# Allegro board BSK-PI_03v1.brd
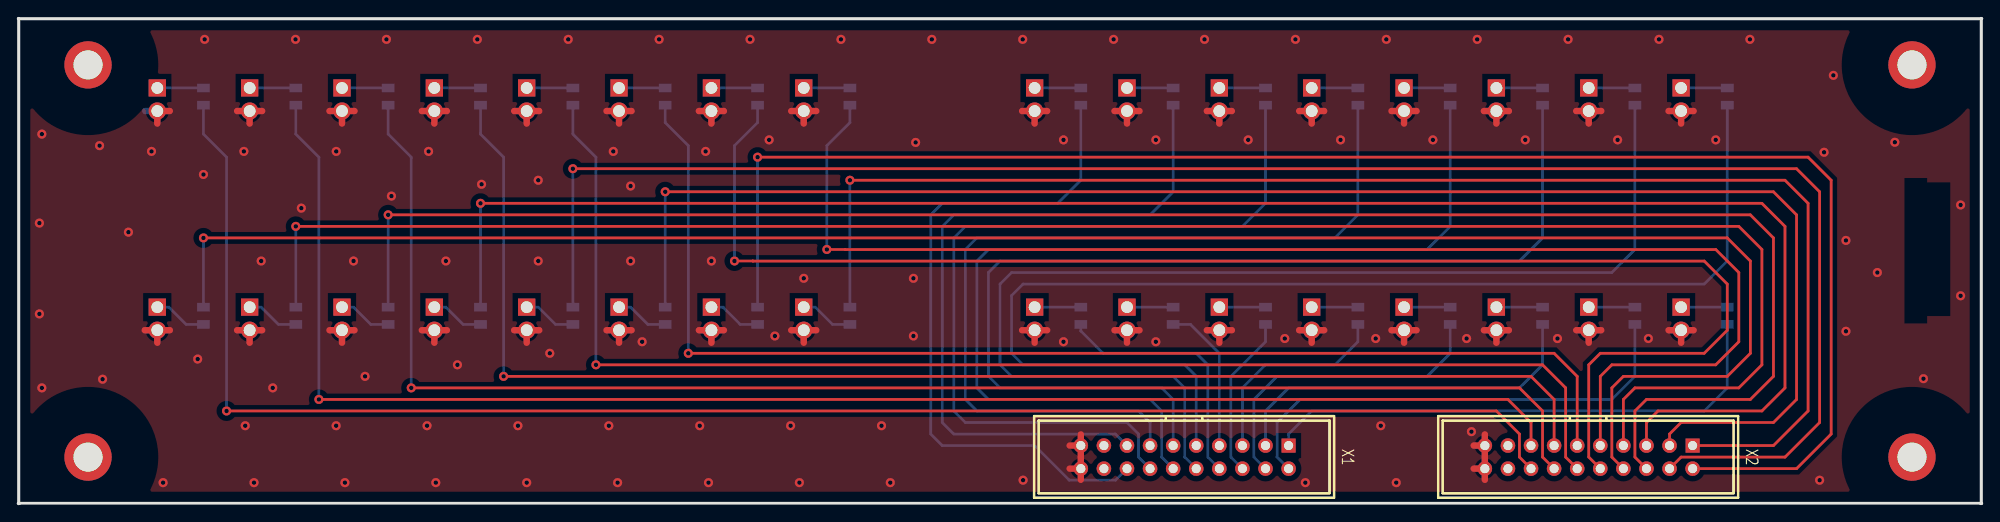
[diagram p0: board, top side]
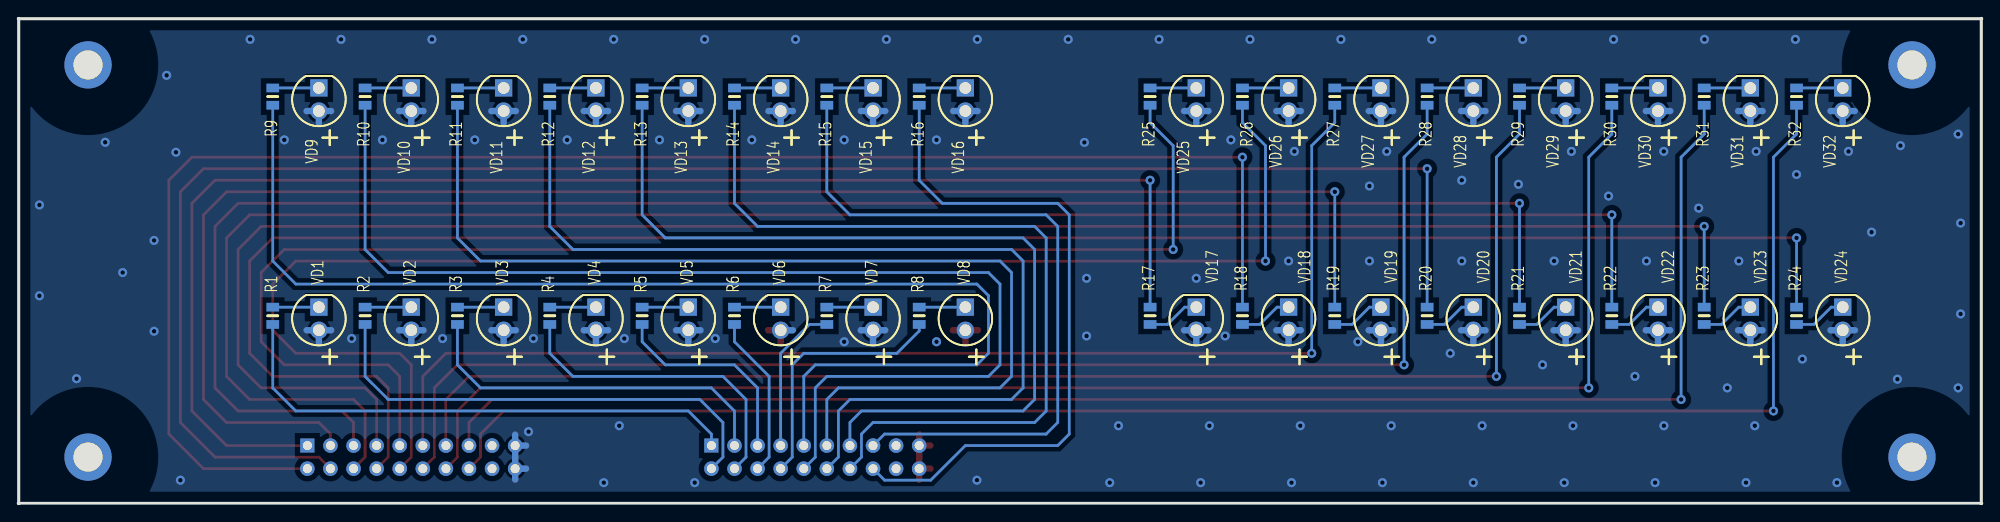
[diagram p1: board, bottom side, seen from below]

Outline 216.03 x 53.47 mm; copper layers: TOP, BOTTOM. Coordinates in mm from the lower left corner of the outline.
Outline path: 0.06,53.4 0.06,0.06 ; 0.06,53.4 215.96,53.4 ; 0.06,53.4 0.06,0.06 ; 0.06,53.4 215.96,53.4 ; 0.06,0.06 215.96,0.06 ; 215.96,53.4 215.96,0.06 ; 215.96,53.4 215.96,0.06 ; 0,53.4 arc(0.06,53.47) 0.13,53.4 arc(0.06,53.34) 0,53.4 ; 0,0.06 arc(0.06,0.13) 0.13,0.06 arc(0.06,0) 0,0.06 ; 0.03,53.4 arc(0.06,53.44) 0.1,53.4 arc(0.06,53.37) 0.03,53.4 ; 0.03,0.06 arc(0.06,0.1) 0.1,0.06 arc(0.06,0.03) 0.03,0.06 ; 215.9,53.4 arc(215.96,53.47) 216.03,53.4 arc(215.96,53.34) 215.9,53.4 ; 215.9,0.06 arc(215.96,0.13) 216.03,0.06 arc(215.96,0) 215.9,0.06 ; 215.93,53.4 arc(215.96,53.44) 216,53.4 arc(215.96,53.37) 215.93,53.4 ; 215.93,0.06 arc(215.96,0.1) 216,0.06 arc(215.96,0.03) 215.93,0.06

## Design rules (mm)
nets with their own width: min track width 0.6; nets +5V

## Placement (name value [footprint] x y rotation side)
NOREF  -  [unnamed]  7.68 5.14 0 top
NOREF#2  -  [unnamed]  208.34 5.14 0 top
NOREF#3  -  [unnamed]  208.34 48.32 0 top
NOREF#4  -  [unnamed]  7.68 48.32 0 top
R1  1k  [RESC2013X60N]  188.02 20.7 270 bottom
R2  1k  [RESC2013X60N]  177.86 20.7 270 bottom
R3  1k  [RESC2013X60N]  167.7 20.7 270 bottom
R4  1k  [RESC2013X60N]  157.54 20.7 270 bottom
R5  1k  [RESC2013X60N]  147.38 20.7 270 bottom
R6  1k  [RESC2013X60N]  137.22 20.7 270 bottom
R7  1k  [RESC2013X60N]  127.06 20.7 270 bottom
R8  1k  [RESC2013X60N]  116.9 20.7 270 bottom
R9  1k  [RESC2013X60N]  188.02 44.83 270 bottom
R10  1k  [RESC2013X60N]  177.86 44.83 270 bottom
R11  1k  [RESC2013X60N]  167.7 44.83 270 bottom
R12  1k  [RESC2013X60N]  157.54 44.83 270 bottom
R13  1k  [RESC2013X60N]  147.38 44.83 270 bottom
R14  1k  [RESC2013X60N]  137.22 44.83 270 bottom
R15  1k  [RESC2013X60N]  127.06 44.83 270 bottom
R16  1k  [RESC2013X60N]  116.9 44.83 270 bottom
R17  1k  [RESC2013X60N]  91.5 20.7 90 bottom
R18  1k  [RESC2013X60N]  81.34 20.7 90 bottom
R19  1k  [RESC2013X60N]  71.18 20.7 90 bottom
R20  1k  [RESC2013X60N]  61.02 20.7 90 bottom
R21  1k  [RESC2013X60N]  50.86 20.7 90 bottom
R22  1k  [RESC2013X60N]  40.7 20.7 90 bottom
R23  1k  [RESC2013X60N]  30.54 20.7 90 bottom
R24  1k  [RESC2013X60N]  20.38 20.7 90 bottom
R25  1k  [RESC2013X60N]  91.5 44.83 270 bottom
R26  1k  [RESC2013X60N]  81.34 44.83 270 bottom
R27  1k  [RESC2013X60N]  71.18 44.83 270 bottom
R28  1k  [RESC2013X60N]  61.02 44.83 270 bottom
R29  1k  [RESC2013X60N]  50.86 44.83 270 bottom
R30  1k  [RESC2013X60N]  40.7 44.83 270 bottom
R31  1k  [RESC2013X60N]  30.54 44.83 270 bottom
R32  1k  [RESC2013X60N]  20.38 44.83 270 bottom
VD1  Green  [LEDRD254W60D590H900USR]  182.94 20.38 270 bottom
VD2  Green  [LEDRD254W60D590H900USR]  172.78 20.38 270 bottom
VD3  Green  [LEDRD254W60D590H900USR]  162.62 20.38 270 bottom
VD4  Green  [LEDRD254W60D590H900USR]  152.46 20.38 270 bottom
VD5  Green  [LEDRD254W60D590H900USR]  142.3 20.38 270 bottom
VD6  Green  [LEDRD254W60D590H900USR]  132.14 20.38 270 bottom
VD7  Green  [LEDRD254W60D590H900USR]  121.98 20.38 270 bottom
VD8  Green  [LEDRD254W60D590H900USR]  111.82 20.38 270 bottom
VD9  Green  [LEDRD254W60D590H900USR]  182.94 44.51 270 bottom
VD10  Green  [LEDRD254W60D590H900USR]  172.78 44.51 270 bottom
VD11  Green  [LEDRD254W60D590H900USR]  162.62 44.51 270 bottom
VD12  Green  [LEDRD254W60D590H900USR]  152.46 44.51 270 bottom
VD13  Green  [LEDRD254W60D590H900USR]  142.3 44.51 270 bottom
VD14  Green  [LEDRD254W60D590H900USR]  132.14 44.51 270 bottom
VD15  Green  [LEDRD254W60D590H900USR]  121.98 44.51 270 bottom
VD16  Green  [LEDRD254W60D590H900USR]  111.82 44.51 270 bottom
VD17  Green  [LEDRD254W60D590H900USR]  86.42 20.38 270 bottom
VD18  Green  [LEDRD254W60D590H900USR]  76.26 20.38 270 bottom
VD19  Green  [LEDRD254W60D590H900USR]  66.1 20.38 270 bottom
VD20  Green  [LEDRD254W60D590H900USR]  55.94 20.38 270 bottom
VD21  Green  [LEDRD254W60D590H900USR]  45.78 20.38 270 bottom
VD22  Green  [LEDRD254W60D590H900USR]  35.62 20.38 270 bottom
VD23  Green  [LEDRD254W60D590H900USR]  25.46 20.38 270 bottom
VD24  Green  [LEDRD254W60D590H900USR]  15.3 20.38 270 bottom
VD25  Green  [LEDRD254W60D590H900USR]  86.42 44.51 270 bottom
VD26  Green  [LEDRD254W60D590H900USR]  76.26 44.51 270 bottom
VD27  Green  [LEDRD254W60D590H900USR]  66.1 44.51 270 bottom
VD28  Green  [LEDRD254W60D590H900USR]  55.94 44.51 270 bottom
VD29  Green  [LEDRD254W60D590H900USR]  45.78 44.51 270 bottom
VD30  Green  [LEDRD254W60D590H900USR]  35.62 44.51 270 bottom
VD31  Green  [LEDRD254W60D590H900USR]  25.46 44.51 270 bottom
VD32  Green  [LEDRD254W60D590H900USR]  15.3 44.51 270 bottom
X1  IDC-20M  [IDC_20M]  128.33 5.14 270 top
X2  IDC-20M  [IDC_20M]  172.78 5.14 270 top

## Library data of the parts
R1-R32 = RES_0.125W
VD1-VD32 = DIODE_LED
X1 X2 = CON_20

## Footprints (pads in the part's own frame, mm; a bottom-side part is the same pattern mirrored in y, then rotated)
IDC_20M
  rect 1.55x1.55 hole 1: 1(-1.27,11.43)
  round 1.6 hole 1: 2(1.27,11.43) 3(-1.27,8.89) 4(1.27,8.89) 5(-1.27,6.35) 6(1.27,6.35) 7(-1.27,3.81) 8(1.27,3.81) 9(-1.27,1.27) 10(1.27,1.27) 11(-1.27,-1.27) 12(1.27,-1.27) 13(-1.27,-3.81) 14(1.27,-3.81) 15(-1.27,-6.35) 16(1.27,-6.35) 17(-1.27,-8.89) 18(1.27,-8.89) 19(-1.27,-11.43) 20(1.27,-11.43)
LEDRD254W60D590H900USR
  round 1.9 hole 1.3: A(1.27,0)
  rect 1.9x1.9 hole 1.3: C(-1.27,0)
RESC2013X60N
  rect 0.95x1.4 smd: 1(-0.95,0) 2(0.95,0)
unnamed
  round 5.2 hole 3.2: 1(0,0)

## Nets
+5V: VD1.A VD2.A VD3.A VD4.A VD5.A VD6.A VD7.A VD8.A VD9.A VD10.A VD11.A VD12.A VD13.A VD14.A VD15.A VD16.A VD17.A VD18.A VD19.A VD20.A VD21.A VD22.A VD23.A VD24.A VD25.A VD26.A VD27.A VD28.A VD29.A VD30.A VD31.A VD32.A X1.19 X1.20 X2.19 X2.20
L1: R1.2 X1.1
L2: R2.2 X1.2
L3: R3.2 X1.3
L4: R4.2 X1.4
L5: R5.2 X1.5
L6: R6.2 X1.6
L7: R7.2 X1.7
L8: R8.2 X1.8
L9: R9.2 X1.9
L10: R10.2 X1.10
L11: R11.2 X1.11
L12: R12.2 X1.12
L13: R13.2 X1.13
L14: R14.2 X1.14
L15: R15.2 X1.15
L16: R16.2 X1.16
L17: R17.2 X2.1
L18: R18.2 X2.2
L19: R19.2 X2.3
L20: R20.2 X2.4
L21: R21.2 X2.5
L22: R22.2 X2.6
L23: R23.2 X2.7
L24: R24.2 X2.8
L25: R25.2 X2.9
L26: R26.2 X2.10
L27: R27.2 X2.11
L28: R28.2 X2.12
L29: R29.2 X2.13
L30: R30.2 X2.14
L31: R31.2 X2.15
L32: R32.2 X2.16
N00176_A1: R3.1 VD3.C
N00176_A2: R4.1 VD4.C
N00176_A3: R5.1 VD5.C
N00176_A4: R6.1 VD6.C
N00176_A5: R7.1 VD7.C
N00176_A6: R8.1 VD8.C
N00176_A7: R9.1 VD9.C
N00176_A8: R10.1 VD10.C
N00176_A9: R11.1 VD11.C
N00176_A10: R12.1 VD12.C
N00176_A11: R13.1 VD13.C
N00176_A12: R14.1 VD14.C
N00176_A13: R15.1 VD15.C
N00176_A14: R16.1 VD16.C
N00176_A15: R17.1 VD17.C
N00176_A16: R18.1 VD18.C
N00176_A17: R19.1 VD19.C
N00176_A18: R20.1 VD20.C
N00176_A19: R21.1 VD21.C
N00176_A20: R22.1 VD22.C
N00176_A21: R23.1 VD23.C
N00176_A22: R24.1 VD24.C
N00176_A23: R25.1 VD25.C
N00176_A24: R26.1 VD26.C
N00176_A25: R27.1 VD27.C
N00176_A26: R28.1 VD28.C
N00176_A27: R29.1 VD29.C
N00176_A28: R30.1 VD30.C
N00176_A29: R31.1 VD31.C
N00176_A30: R2.1 VD2.C
N00176_A31: R32.1 VD32.C
N00130: R1.1 VD1.C

Pads without a net: NOREF 1; NOREF#2 1; NOREF#3 1; NOREF#4 1; X1 17 18; X2 17 18

## Via types
v1: diameter 1, hole 0.5, TOP to BOTTOM, 118 vias

## Routing (per net, layer and track width the routed paths; a pad name or vN(x,y) marks a point on that pad's centre or on a via; arc(x,y) is an arc through that point)
+5V: length 273.9
  TOP w0.7: VD27.A 67.48,43.24 ; VD27.A 64.72,43.24 ; VD27.A 66.1,41.87 ; 142.3,41.87 VD13.A ; VD13.A 140.93,43.24 ; VD13.A 143.68,43.24 ; 161.35,2.65 X2.20 ; X2.20 161.35,5.1 ; X2.20 160.12,3.87 ; 64.72,19.11 VD19.A ; VD19.A 66.1,17.73 ; VD19.A 67.48,19.11 ; VD11.A 164,43.24 ; VD11.A 161.25,43.24 ; VD11.A 162.62,41.87 ; 44.41,43.24 VD29.A ; VD29.A 45.78,41.87 ; VD29.A 47.16,43.24 ; 74.88,43.24 VD26.A ; VD26.A 76.26,41.87 ; VD26.A 77.64,43.24 ; VD18.A 77.64,19.11 ; VD18.A 74.88,19.11 ; VD18.A 76.26,17.73 ; 172.78,41.87 VD10.A ; VD10.A 174.16,43.24 ; VD10.A 171.41,43.24 ; 44.41,19.11 VD21.A ; VD21.A 47.16,19.11 ; VD21.A 45.78,17.73 ; VD28.A 57.32,43.24 ; VD28.A 54.56,43.24 ; VD28.A 55.94,41.87 ; VD1.A 184.32,19.11 ; VD1.A 181.56,19.11 ; VD1.A 182.94,17.73 ; VD20.A 57.32,19.11 ; VD20.A 55.94,17.73 ; VD20.A 54.56,19.11 ; 161.35,5.19 X2.19 ; X2.19 160.12,6.41 ; X2.19 161.35,7.64 ; 35.62,41.87 VD30.A ; VD30.A 34.25,43.24 ; VD30.A 37,43.24 ; 85.04,43.24 VD25.A ; VD25.A 87.8,43.24 ; VD25.A 86.42,41.87 ; 34.25,19.11 VD22.A ; VD22.A 35.62,17.73 ; VD22.A 37,19.11 ; 121.98,17.73 VD7.A ; VD7.A 120.61,19.11 ; VD7.A 123.36,19.11 ; X1.19 116.9,7.64 ; X1.19 115.67,6.41 ; X1.19 116.9,5.19 ; 111.82,17.73 VD8.A ; VD8.A 110.44,19.11 ; VD8.A 113.2,19.11 ; 142.3,17.73 VD5.A ; VD5.A 140.93,19.11 ; VD5.A 143.68,19.11 ; 181.56,43.24 VD9.A ; VD9.A 184.32,43.24 ; VD9.A 182.94,41.87 ; 130.76,43.24 VD14.A ; VD14.A 133.52,43.24 ; VD14.A 132.14,41.87 ; VD12.A 153.84,43.24 ; VD12.A 151.08,43.24 ; VD12.A 152.46,41.87 ; VD23.A 26.84,19.11 ; VD23.A 25.46,17.73 ; VD23.A 24.09,19.11 ; X1.20 116.9,5.1 ; X1.20 116.9,2.65 ; X1.20 115.67,3.87 ; 171.41,19.11 VD2.A ; VD2.A 174.16,19.11 ; VD2.A 172.78,17.73 ; 162.62,17.73 VD3.A ; VD3.A 161.25,19.11 ; VD3.A 164,19.11 ; 15.3,17.73 VD24.A ; VD24.A 16.68,19.11 ; VD24.A 13.93,19.11 ; 132.14,17.73 VD6.A ; VD6.A 130.76,19.11 ; VD6.A 133.52,19.11 ; 24.09,43.24 VD31.A ; VD31.A 25.46,41.87 ; VD31.A 26.84,43.24 ; VD15.A 123.36,43.24 ; VD15.A 120.61,43.24 ; VD15.A 121.98,41.87 ; 111.82,41.87 VD16.A ; VD16.A 110.44,43.24 ; VD16.A 113.2,43.24 ; VD17.A 87.8,19.11 ; VD17.A 85.04,19.11 ; VD17.A 86.42,17.73 ; 152.46,17.73 VD4.A ; VD4.A 153.84,19.11 ; VD4.A 151.08,19.11 ; 16.68,43.24 VD32.A 15.3,41.87
  BOTTOM w0.7: X2.20 161.35,5.05 ; X2.20 160.17,3.87 ; X2.20 161.35,2.69 ; 142.3,17.78 VD5.A ; VD5.A 140.97,19.11 ; VD5.A 143.63,19.11 ; 161.29,19.11 VD3.A ; VD3.A 162.62,17.78 ; VD3.A 163.95,19.11 ; 181.61,19.11 VD1.A ; VD1.A 182.94,17.78 ; VD1.A 184.27,19.11 ; VD32.A 16.63,43.24 ; VD32.A 15.3,41.91 ; VD32.A 13.97,43.24 ; 160.17,6.41 X2.19 ; X2.19 161.35,5.23 ; X2.19 161.35,7.59 ; 152.46,17.78 VD4.A ; VD4.A 153.79,19.11 ; VD4.A 151.13,19.11 ; 121.98,41.91 VD15.A ; VD15.A 120.65,43.24 ; VD15.A 123.31,43.24 ; 54.61,19.11 VD20.A ; VD20.A 55.94,17.78 ; VD20.A 57.27,19.11 ; VD22.A 36.95,19.11 ; VD22.A 34.29,19.11 ; VD22.A 35.62,17.78 ; VD13.A 143.63,43.24 ; VD13.A 140.97,43.24 ; VD13.A 142.3,41.91 ; 24.13,43.24 VD31.A ; VD31.A 26.79,43.24 ; VD31.A 25.46,41.91 ; 171.45,43.24 VD10.A ; VD10.A 172.78,41.91 ; VD10.A 174.11,43.24 ; 25.46,17.78 VD23.A ; VD23.A 24.13,19.11 ; VD23.A 26.79,19.11 ; 171.45,19.11 VD2.A ; VD2.A 174.11,19.11 ; VD2.A 172.78,17.78 ; 130.81,43.24 VD14.A ; VD14.A 133.47,43.24 ; VD14.A 132.14,41.91 ; 110.49,43.24 VD16.A ; VD16.A 111.82,41.91 ; VD16.A 113.15,43.24 ; 45.78,41.91 VD29.A ; VD29.A 44.45,43.24 ; VD29.A 47.11,43.24 ; 74.93,43.24 VD26.A ; VD26.A 76.26,41.91 ; VD26.A 77.59,43.24 ; 13.97,19.11 VD24.A ; VD24.A 15.3,17.78 ; VD24.A 16.63,19.11 ; 85.09,43.24 VD25.A ; VD25.A 87.75,43.24 ; VD25.A 86.42,41.91 ; 66.1,17.78 VD19.A ; VD19.A 67.43,19.11 ; VD19.A 64.77,19.11 ; 76.26,17.78 VD18.A ; VD18.A 74.93,19.11 ; VD18.A 77.59,19.11 ; 161.29,43.24 VD11.A ; VD11.A 163.95,43.24 ; VD11.A 162.62,41.91 ; VD9.A 184.27,43.24 ; VD9.A 182.94,41.91 ; VD9.A 181.61,43.24 ; 45.78,17.78 VD21.A ; VD21.A 47.11,19.11 ; VD21.A 44.45,19.11 ; VD12.A 153.79,43.24 ; VD12.A 151.13,43.24 ; VD12.A 152.46,41.91 ; 55.94,41.91 VD28.A ; VD28.A 57.27,43.24 ; VD28.A 54.61,43.24 ; 121.98,17.78 VD7.A ; VD7.A 120.65,19.11 ; VD7.A 123.31,19.11 ; 64.77,43.24 VD27.A ; VD27.A 66.1,41.91 ; VD27.A 67.43,43.24 ; 34.29,43.24 VD30.A ; VD30.A 36.95,43.24 ; VD30.A 35.62,41.91 ; 86.42,17.78 VD17.A ; VD17.A 87.75,19.11 ; VD17.A 85.09,19.11 ; 130.81,19.11 VD6.A
  vias: v1(2.33,30.91) v1(2.33,20.91) v1(2.6,40.7) v1(2.6,12.76) v1(8.95,39.43) v1(9.29,13.72) v1(12.13,29.91) v1(14.67,38.8) v1(15.94,2.33) v1(19.75,15.94) v1(20.38,36.26) v1(20.51,51.13) v1(24.83,38.8) v1(24.98,8.6) v1(25.94,2.33) v1(26.73,26.73) v1(28,12.76) v1(30.51,51.13) v1(31.15,32.55) v1(34.99,38.8) v1(34.98,8.6) v1(35.94,2.33) v1(36.89,26.73) v1(38.16,14.03) v1(40.51,51.13) v1(41.06,33.88) v1(44.98,8.6) v1(45.15,38.8) v1(45.94,2.33) v1(47.05,26.73) v1(48.32,15.3) v1(50.51,51.13) v1(50.98,35.18) v1(54.98,8.6) v1(55.94,2.33) v1(57.21,35.62) v1(57.21,26.73) v1(58.48,16.57) v1(60.51,51.13) v1(64.98,8.6) v1(65.47,38.8) v1(65.94,2.33) v1(67.37,34.99) v1(67.37,26.73) v1(68.64,17.84) v1(70.51,51.13) v1(74.98,8.6) v1(75.63,38.8) v1(75.94,2.33) v1(76.26,26.73) v1(80.51,51.13) v1(82.61,40.07) v1(83.25,18.48) v1(84.98,8.6) v1(85.94,2.33) v1(86.42,24.83) v1(90.51,51.13) v1(94.98,8.6) v1(95.94,2.33) v1(98.49,24.83) v1(98.49,18.48) v1(98.73,39.79) v1(100.51,51.13) v1(110.51,51.13) v1(110.55,2.6) v1(115,40.07) v1(115,17.84) v1(120.51,51.13) v1(125.16,40.07) v1(125.16,17.84) v1(130.51,51.13) v1(135.32,40.07) v1(139.34,18.2) v1(140.51,51.13) v1(141.61,2.33) v1(145.48,40.07) v1(149.34,18.2) v1(149.9,8.6) v1(150.51,51.13) v1(151.61,2.33) v1(155.64,40.07) v1(159.34,18.2) v1(159.88,7.95) v1(160.51,51.13) v1(165.8,40.07) v1(169.34,18.2) v1(170.51,51.13) v1(175.96,40.07) v1(179.34,18.2) v1(180.51,51.13) v1(186.75,40.07) v1(190.51,51.13) v1(198.18,2.6) v1(198.67,38.7) v1(199.69,47.17) v1(201.08,29) v1(201.08,19) v1(204.53,25.46) v1(206.46,39.8) v1(209.61,13.78) v1(213.69,32.9) v1(213.69,22.9)
L1: length 58.6
  BOTTOM w0.3: R1.2 188.02,12.76 185.48,10.22 142.3,10.22 139.76,7.68 X1.1
L2: length 52.8
  BOTTOM w0.3: R2.2 177.86,14.03 175.32,11.49 141.03,11.49 138.49,8.95 138.49,5.14 X1.2
L3: length 40.8
  BOTTOM w0.3: X1.3 137.22,10.22 139.76,12.76 165.16,12.76 167.7,15.3 R3.2
L4: length 35
  BOTTOM w0.3: X1.4 135.95,5.14 135.95,11.49 138.49,14.03 155,14.03 157.54,16.57 R4.2
L5: length 23.1
  BOTTOM w0.3: X1.5 134.68,12.76 137.22,15.3 144.84,15.3 147.38,17.84 R5.2
L6: length 18
  BOTTOM w0.3: X1.6 133.41,5.14 133.41,14.03 137.22,17.84 R6.2
L7: length 16.6
  BOTTOM w0.3: X1.7 132.14,16.57 128.96,19.75 R7.2
L8: length 28.2
  BOTTOM w0.3: R8.2 116.9,19.03 119.36,16.57 129.6,16.57 130.87,15.3 130.87,5.14 X1.8
L9: length 132.8
  BOTTOM w0.3: R9.2 188.02,26.73 185.48,24.19 110.55,24.19 109.28,22.92 109.28,16.57 110.55,15.3 128.33,15.3 129.6,14.03 X1.9
L10: length 127
  BOTTOM w0.3: R10.2 177.86,28 175.32,25.46 109.28,25.46 108.01,24.19 108.01,15.3 109.28,14.03 127.06,14.03 128.33,12.76 128.33,5.14 X1.10
L11: length 115
  BOTTOM w0.3: X1.11 127.06,11.49 125.79,12.76 108.01,12.76 106.74,14.03 106.74,25.46 108.01,26.73 165.16,26.73 167.7,29.27 R11.2
L12: length 109.2
  BOTTOM w0.3: X1.12 125.79,5.14 125.79,10.22 124.52,11.49 106.74,11.49 105.47,12.76 105.47,26.73 106.74,28 155,28 157.54,30.54 R12.2
L13: length 97.3
  BOTTOM w0.3: R13.2 147.38,31.81 144.84,29.27 105.47,29.27 104.2,28 104.2,11.49 105.47,10.22 123.25,10.22 124.52,8.95 X1.13
L14: length 91.4
  BOTTOM w0.3: R14.2 137.22,33.08 134.68,30.54 104.2,30.54 102.93,29.27 102.93,10.22 104.2,8.95 121.98,8.95 123.25,7.68 123.25,5.14 X1.14
L15: length 79.5
  BOTTOM w0.3: X1.15 120.71,7.68 102.93,7.68 101.66,8.95 101.66,30.54 102.93,31.81 124.52,31.81 127.06,34.35 R15.2
L16: length 74.7
  BOTTOM w0.3: X1.16 120.71,2.6 115.63,2.6 111.82,6.41 101.66,6.41 100.39,7.68 100.39,31.81 101.66,33.08 114.36,33.08 116.9,35.62 R16.2
L17: length 157.6
  TOP w0.3: X2.1 193.1,6.41 196.91,10.22 196.91,33.08 194.37,35.62 v1(91.5,35.62)
  BOTTOM w0.3: v1(91.5,35.62) R17.2
L18: length 180.4
  TOP w0.3: v1(81.34,38.16) 196.91,38.16 199.45,35.62 199.45,7.68 195.64,3.87 X2.2
  BOTTOM w0.3: v1(81.34,38.16) R18.2
L19: length 175.4
  TOP w0.3: v1(71.18,34.35) 193.1,34.35 195.64,31.81 195.64,11.49 193.1,8.95 182.94,8.95 181.67,7.68 X2.3
  BOTTOM w0.3: v1(71.18,34.35) R19.2
L20: length 197.5
  TOP w0.3: v1(61.02,36.89) 195.64,36.89 198.18,34.35 198.18,8.95 194.37,5.14 182.94,5.14 X2.4
  BOTTOM w0.3: v1(61.02,36.89) R20.2
L21: length 193.1
  TOP w0.3: X2.5 179.13,8.95 180.4,10.22 191.83,10.22 194.37,12.76 194.37,30.54 191.83,33.08 v1(50.86,33.08)
  BOTTOM w0.3: v1(50.86,33.08) R21.2
L22: length 202.5
  TOP w0.3: v1(40.7,31.81) 190.56,31.81 193.1,29.27 193.1,14.03 190.56,11.49 179.13,11.49 177.86,10.22 177.86,5.14 X2.6
  BOTTOM w0.3: v1(40.7,31.81) R22.2
L23: length 205.8
  TOP w0.3: v1(30.54,30.54) 189.29,30.54 191.83,28 191.83,15.3 189.29,12.76 177.86,12.76 176.59,11.49 X2.7
  BOTTOM w0.3: v1(30.54,30.54) R23.2
L24: length 215.2
  TOP w0.3: X2.8 175.32,5.14 175.32,12.76 176.59,14.03 188.02,14.03 190.56,16.57 190.56,26.73 188.02,29.27 v1(20.38,29.27)
  BOTTOM w0.3: v1(20.38,29.27) R24.2
L25: length 150.4
  TOP w0.3: v1(88.96,28) 90.99,28 91,28 186.76,28 189.29,25.46 189.29,17.84 186.75,15.3 175.32,15.3 174.05,14.03 X2.9
  BOTTOM w0.3: R25.2 91.5,41.97 88.96,39.43 v1(88.96,28)
L26: length 162.3
  TOP w0.3: X2.10 172.78,5.14 172.78,15.3 174.05,16.57 185.48,16.57 188.02,19.11 188.02,24.19 185.49,26.73 80.84,26.73 80.83,26.73 v1(78.8,26.73)
  BOTTOM w0.3: v1(78.8,26.73) 78.8,39.43 81.34,41.97 R26.2
L27: length 134.8
  TOP w0.3: X2.11 171.51,14.03 168.97,16.57 v1(73.72,16.57)
  BOTTOM w0.3: v1(73.72,16.57) 73.72,39.43 71.18,41.97 R27.2
L28: length 146.8
  TOP w0.3: X2.12 170.24,5.14 170.24,12.76 167.7,15.3 v1(63.56,15.3)
  BOTTOM w0.3: R28.2 61.02,40.7 63.56,38.16 v1(63.56,15.3)
L29: length 152.6
  TOP w0.3: v1(53.4,14.03) 166.43,14.03 168.97,11.49 X2.13
  BOTTOM w0.3: R29.2 50.86,40.7 53.4,38.16 v1(53.4,14.03)
L30: length 164.6
  TOP w0.3: X2.14 167.7,5.14 167.7,10.22 165.16,12.76 v1(43.24,12.76)
  BOTTOM w0.3: R30.2 40.7,40.7 43.24,38.16 v1(43.24,12.76)
L31: length 170.4
  TOP w0.3: v1(33.08,11.49) 163.89,11.49 166.43,8.95 X2.15
  BOTTOM w0.3: R31.2 30.54,40.7 33.08,38.16 v1(33.08,11.49)
L32: length 182.3
  TOP w0.3: X2.16 165.16,5.14 165.16,7.68 162.62,10.22 v1(22.92,10.22)
  BOTTOM w0.3: R32.2 20.38,40.7 22.92,38.16 v1(22.92,10.22)
N00176_A1: length 5.1
  BOTTOM w0.3: R3.1 VD3.C
N00176_A2: length 5.1
  BOTTOM w0.3: R4.1 VD4.C
N00176_A3: length 5.1
  BOTTOM w0.3: R5.1 VD5.C
N00176_A4: length 5.1
  BOTTOM w0.3: R6.1 VD6.C
N00176_A5: length 5.1
  BOTTOM w0.3: R7.1 VD7.C
N00176_A6: length 5.1
  BOTTOM w0.3: R8.1 VD8.C
N00176_A7: length 5.1
  BOTTOM w0.3: R9.1 VD9.C
N00176_A8: length 5.1
  BOTTOM w0.3: R10.1 VD10.C
N00176_A9: length 5.1
  BOTTOM w0.3: R11.1 VD11.C
N00176_A10: length 5.1
  BOTTOM w0.3: VD12.C R12.1
N00176_A11: length 5.1
  BOTTOM w0.3: R13.1 VD13.C
N00176_A12: length 5.1
  BOTTOM w0.3: R14.1 VD14.C
N00176_A13: length 5.1
  BOTTOM w0.3: R15.1 VD15.C
N00176_A14: length 5.1
  BOTTOM w0.3: R16.1 VD16.C
N00176_A15: length 5.9
  BOTTOM w0.3: R17.1 89.59,19.75 87.69,21.65 VD17.C
N00176_A16: length 5.9
  BOTTOM w0.3: R18.1 79.43,19.75 77.53,21.65 VD18.C
N00176_A17: length 5.9
  BOTTOM w0.3: VD19.C 67.37,21.65 69.27,19.75 R19.1
N00176_A18: length 5.9
  BOTTOM w0.3: R20.1 59.11,19.75 57.21,21.65 VD20.C
N00176_A19: length 5.9
  BOTTOM w0.3: R21.1 48.95,19.75 47.05,21.65 VD21.C
N00176_A20: length 5.9
  BOTTOM w0.3: R22.1 38.79,19.75 36.89,21.65 VD22.C
N00176_A21: length 5.9
  BOTTOM w0.3: R23.1 28.63,19.75 26.73,21.65 VD23.C
N00176_A22: length 5.9
  BOTTOM w0.3: R24.1 18.47,19.75 16.57,21.65 VD24.C
N00176_A23: length 5.1
  BOTTOM w0.3: R25.1 VD25.C
N00176_A24: length 5.1
  BOTTOM w0.3: R26.1 VD26.C
N00176_A25: length 5.1
  BOTTOM w0.3: R27.1 VD27.C
N00176_A26: length 5.1
  BOTTOM w0.3: R28.1 VD28.C
N00176_A27: length 5.1
  BOTTOM w0.3: R29.1 VD29.C
N00176_A28: length 5.1
  BOTTOM w0.3: R30.1 VD30.C
N00176_A29: length 5.1
  BOTTOM w0.3: R31.1 VD31.C
N00176_A30: length 5.1
  BOTTOM w0.3: R2.1 VD2.C
N00176_A31: length 5.1
  BOTTOM w0.3: R32.1 VD32.C
N00130: length 5.1
  BOTTOM w0.3: R1.1 VD1.C

## Copper pours and planes (outline as drawn; the poured copper is in the pictures)
+5V on TOP: 1.33,52.13 1.33,1.33 214.69,1.33 214.69,52.13
+5V on BOTTOM: 1.33,1.33 214.69,1.33 214.69,52.13 1.33,52.13

## Text on the board
Ref Des/Assembly Top: January 2013 | BSK-PI_03v1
PLACE_BOUND_BOTTOM: FIGURE | SIZE | 0.5 | 1.0 | 1.3 | 3.2 | DRILL CHART: TOP to BOTTOM | ALL UNITS ARE IN MILLIMETERS | PLATED | QTY | 118 | 40 | 64 | 4
